# Altium PCB PCB.PcbDoc
Units mil, origin at the board's own origin, x right, y up, seen from the top; angles counter-clockwise.
Board outline 885.03 x 890.03 mil, 2 copper layers (Top Layer, Bottom Layer); 8 components, 6 nets, 27 pads, 2 vias.
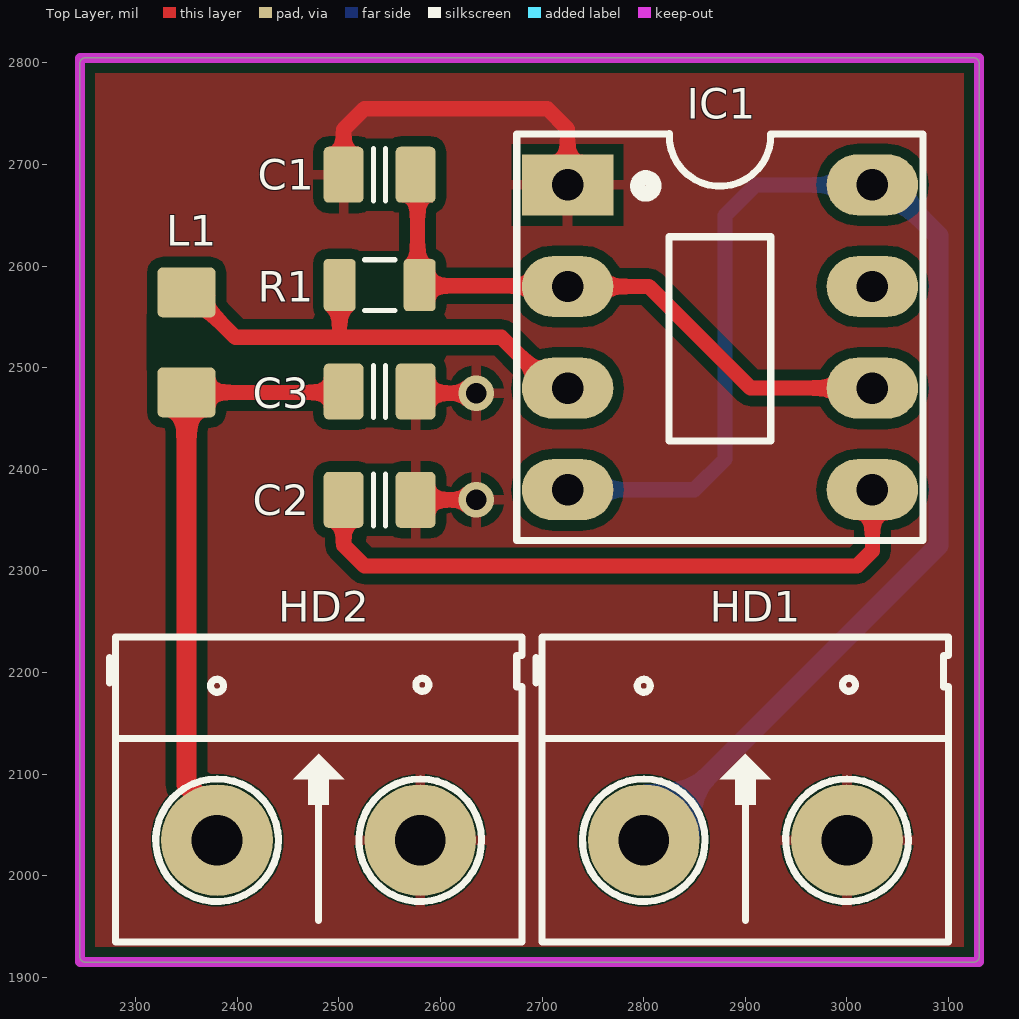
[diagram p0: Top Layer view]
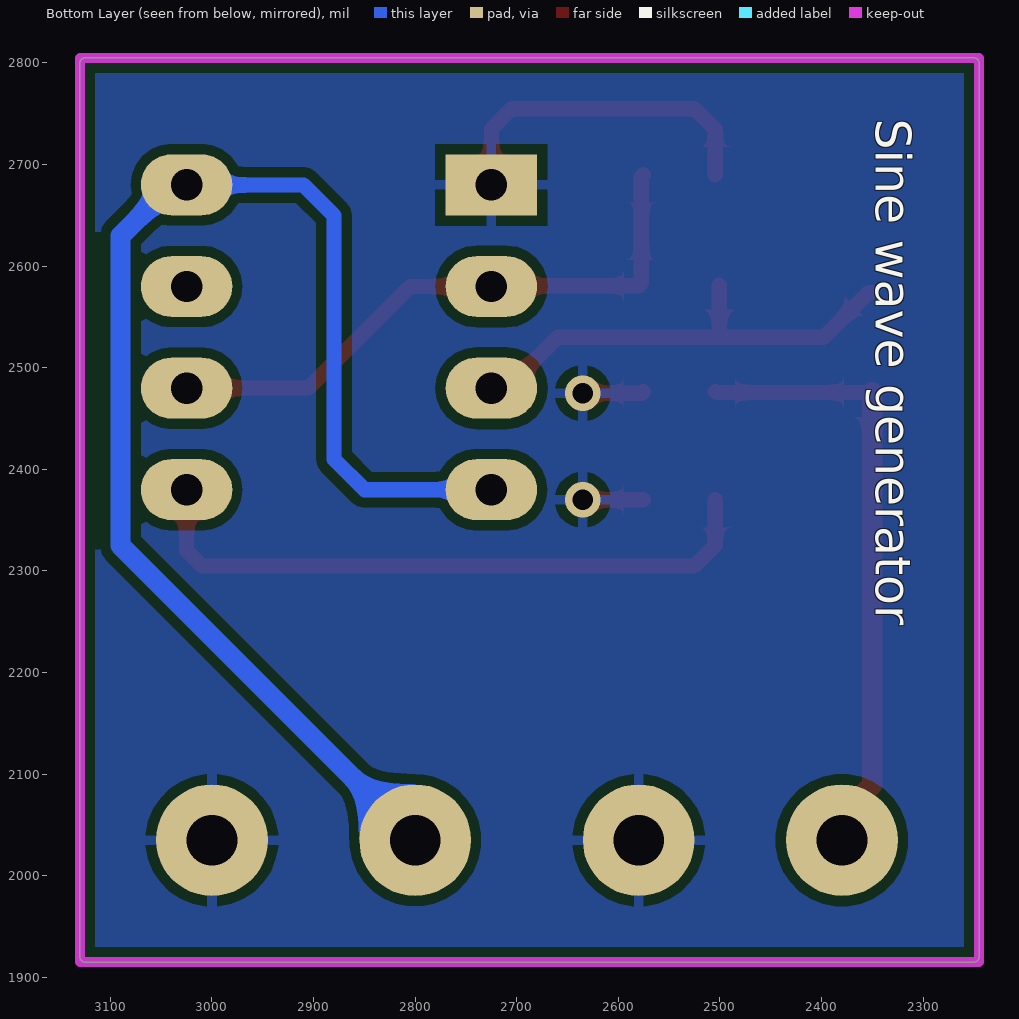
[diagram p1: Bottom Layer view, seen from below]
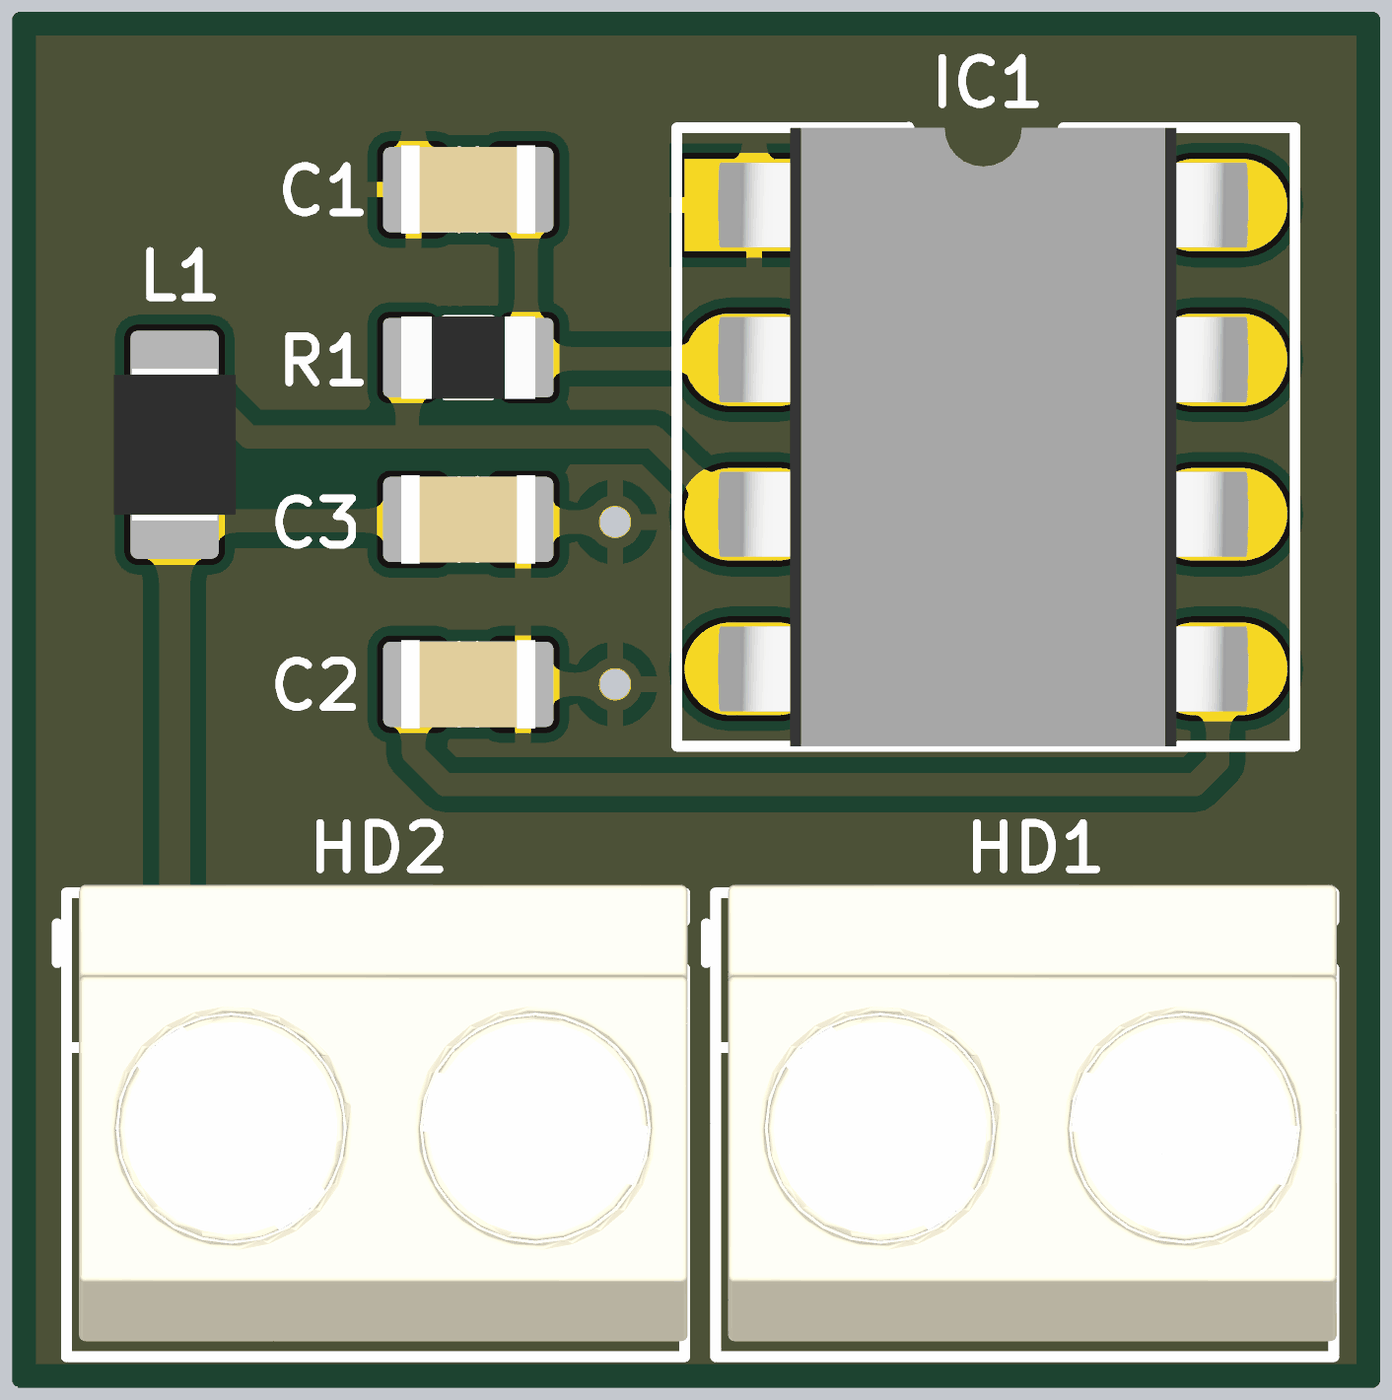
[diagram p2: 3D render of the assembled board from above, using the file's embedded part models]

## Layer stack, top to bottom
Top Solder: solder mask 0.4, Solder Resist, Dk 3.5
Top Layer: signal copper 1.4
Dielectric 1: dielectric 12.6, FR-4, Dk 4.8
Bottom Layer: signal copper 1.4
Bottom Solder: solder mask 0.4, Solder Resist, Dk 3.5

## Board outline
2244.99,1920 ccw(c2250,1920) 2250,1914.98 3125,1914.98 ccw(c3125,1920) 3130.01,1920 3130.01,2800 ccw(c3125,2800) 3125,2805.01 2250,2805.01 ccw(c2250,2800) 2244.99,2800

## Design rules (kind name [scope] priority, off if disabled: settings)
Clearance [All] p1: gap=10 ignorepadtopadclearanceinfootprint=FALSE
PolygonConnect [All] p1: connectstyle=Relief reliefconductorwidth=10 reliefentries=4 polygonreliefangle="90 Angle" airgapwidth=10
RoutingVias [All] p1: holewidth=20 width=35 viastyle="Through Hole" minholewidth=15 minwidth=25 maxholewidth=28 maxwidth=50
SolderMaskExpansion [All] p1: expansion=4 istentingtop=FALSE
Width [All] p1: maxlimit=50 minlimit=10 preferedwidth=20
30 further rules are at their usual default settings.

## Components (designator, comment, footprint, x,y, rotation, side; value= is the part's Value field where it differs from the comment)
C1 "approved sub OK" CAPC2012X135N 2540,2690 r0 top value=10nF
C2 "approved sub OK" CAPC2012X135N 2540,2370 r0 top value=100nF
C3 "approved sub OK" CAPC2012X135N 2540,2476.67 r0 top value=1uF
HD1 "Header 2" HED2 2800,2035 r0 top
HD2 "Header 2" HED2 2380,2035 r0 top
IC1 "LM555" DIP8/W0.3 2725,2680 r270 top
L1 "470u" INDM2520X190N 2350,2525 r270 top
R1 "Jumper" RESC2012N_ZERO 2540,2581.36 r180 top value=2.2k

## Footprints (in the part's own frame and the unit in brackets; to place one, negate y for a bottom-side part, rotate by r counter-clockwise, add the part's x,y. Pads: shape width x height; smd on the part's side, far side on the other; paste and mask are expansions set on the pad)
CAPC2012X135N [mm] "Chip Capacitor, Body 2.0x1.2mm, EIA 0805, IPC Medium Density"
  round 0.254 on Mech15: 0(0,0)
  rrect25% 1x1.4 smd: 1(-0.9,0) 2(0.9,0)
  Top Layer pour cut-out: -0.675,0.7 -0.475,0.9 0.475,0.9 0.675,0.7 0.675,-0.7 0.475,-0.9 -0.475,-0.9 -0.675,-0.7
  silkscreen extent -0.15,-0.65 0.15,0.65, body extent -1.1,-0.72 1.1,0.73, height 1.34
DIP8/W0.3 [mil] "8 PIN, W 300mil, Pin to pin 100mil"
  rect 60x90 hole 31: 1(0,0)
  oval 60x90 hole 31: 2(100,0) 3(200,0) 4(300,0) 5(300,300) 6(200,300) 7(100,300) 8(0,300)
  silkscreen extent -50,-50 350,350, body extent -50,-40 350,336, height 201
HED2 [mil] "Header 2, 2 pin, hight 300mil, Pin to Pin 200, Colour Green"
  round 110 hole 50: 1(0,0) 2(200,0)
  silkscreen extent -106,-100 300,200, body extent -92,-90 302,205, height 394
INDM2520X190N [mm] "Inductor, molded body 2.5x2.0mm"
  round 0.508 on Mech15: 0(0,0)
  rrect20% 1.25x1.45 smd: 1(-1.25,0) 2(1.25,0)
  Top Layer pour cut-out: -0.7,1 0.7,1 0.7,-1 -0.7,-1
  body extent -1.25,-1 1.25,1, height 1.79
RESC2012N_ZERO [mm] "Chip Resistor, Body 2.0x1.2mm, 0805, IPC Medium Density"
  round 0.254 on Mech15: 0(0,0)
  rrect25% 0.8x1.3 smd: 1(-1,0) 2(1,0)
  Top Layer pour cut-out: -0.725,0.65 -0.525,0.85 0.525,0.85 0.725,0.65 0.725,-0.65 0.525,-0.85 -0.525,-0.85 -0.725,-0.65
  silkscreen extent -0.38,-0.64 0.38,0.64, body extent -1.1,-0.67 1.1,0.68, height 0.69

## Part data
C1 C2 C3: library part "CAP C_0805", "Capacitor SMD Cer 1.8nF 10% 50V X7R 0805", Manufacturer 1="AVX Corporation", Manufacturer Part Number 1=08055C182KAT2A, Operating Temperature="-55°C ~ 125°C", Package / Case="0805 (2012 metric)", Ratings="50V; X7R", Supplier Part Number 1=478-1374-1-ND, Tolerance=±10%, SCDType=source*, Supplier 1=Digi-Key
HD1 HD2: "Header 2 (Green)"
IC1: "Timer"
L1: library part Inductor_1008, "Inductor SMD chip 47nH 1008", DC Resistance (DCR)="160 mOhm Max", Manufacturer 1="Abracon Corporation", Manufacturer Part Number 1=AISC-1008-R047J-T, Package / Case="1008 (2520 Metric)", Ratings="1 A", Supplier Part Number 1=535-10535-1-ND, Tolerance=±5%, Material=Ceramic, SCDType=source, Supplier 1=Digi-Key
R1: library part RES_0805, "Resistor SMD chip 0.0 Ohm 0.125W 0805", Manufacturer 1="Samsung Electro-Mechanics America, Inc", Manufacturer 2="Stackpole Electronics Inc", Manufacturer 3=Yageo, Manufacturer 4="Panasonic Electronic Components", Manufacturer 5="Rohm Semiconductor", Manufacturer Part Number 1=RC2012J000CS, Manufacturer Part Number 2=RMCF0805ZT0R00, Manufacturer Part Number 3=RC0805JR-070RL, Manufacturer Part Number 4=ERJ-6GEY0R00V, Manufacturer Part Number 5=MCR10ERTJ000, Package / Case="0805 (2012 metric)", Ratings=1/8W, Supplier Part Number 1=1276-5466-6-ND, Tolerance=N/A, ComponentLink1Description=http://www.samsungsem.com/servlet/FileDownload?filename=productcatalog/pdf/Chip_Resistor.pdf, ComponentLink1URL=http://www.samsungsem.com/servlet/FileDownload?filename=productcatalog/pdf/Chip_Resistor.pdf, ComponentLink2Description=http://www.seielect.com/Catalog/SEI-RMCF_RMCP.pdf, ComponentLink2URL=http://www.seielect.com/Catalog/SEI-RMCF_RMCP.pdf, ComponentLink3Description=http://media.digikey.com/pdf/Data%20Sheets/Yageo%20PDFs/RC0805%20Pb%20Free.pdf, ComponentLink3URL=http://media.digikey.com/pdf/Data%20Sheets/Yageo%20PDFs/RC0805%20Pb%20Free.pdf, ComponentLink4Description=http://industrial.panasonic.com/www-cgi/jvcr13pz.cgi?E+PZ+3+AOA0001+ERJ6GEY0R00V+7+WW, ComponentLink4URL=http://industrial.panasonic.com/www-cgi/jvcr13pz.cgi?E+PZ+3+AOA0001+ERJ6GEY0R00V+7+WW, ComponentLink5Description=http://rohmfs.rohm.com/en/products/databook/datasheet/passive/resistor/chip_resistor/mcr_g.pdf, ComponentLink5URL=http://rohmfs.rohm.com/en/products/databook/datasheet/passive/resistor/chip_resistor/mcr_g.pdf, RoHS 1="RoHS Compliant", RoHS 2="RoHS Compliant", RoHS 3="RoHS Compliant", RoHS 4="RoHS Compliant", RoHS 5="RoHS Compliant", SCDType=spec, Supplier 1=Digi-Key, Supplier 2=Digi-Key, Supplier 3=Digi-Key, Supplier 4=Digi-Key, Supplier 5=Digi-Key, Supplier Part Number 2=RMCF0805ZT0R00DKR-ND, Supplier Part Number 3=311-0.0ARDKR-ND, Supplier Part Number 4=P0.0ADKR-ND, Supplier Part Number 5=RHM0.0CPDKR-ND

## Via types
v1: diameter 35, hole 20, Top Layer to Bottom Layer, tented both sides, 2 vias

## Nets (pads, with @x,y where several pads share a name; then routed paths per layer and width w, separated by ;. In a path a pad name is that pad's centre, name@x,y a point inside that pad or via, vN(x,y) a via of type N, cw(c..) or ccw(c..) an arc to the next point about the centre after c; other vN are vias at no path point)
+4.5: HD1.1 IC1.4 IC1.8 | length 1365.7
  Bottom Layer w15: IC1.4 2850,2380 2880,2410 2880,2650 2910,2680 IC1.8
  Bottom Layer w20: HD1.1 3090,2325 3090,2630 3040,2680 IC1.8
GND: C1.1 C2.2 C3.2 HD1.2 HD2.2 IC1.1 | length 456.6
  Top Layer w15: C1.1 2504.57,2734.57 2525,2755 2705,2755 2725,2735 IC1.1 ; C2.2 v1(2635,2370) ; C3.2 2577.1,2475 v1(2635,2475)
NetC1_2: C1.2 IC1.2 IC1.6 R1.1 | length 597.9
  Top Layer w15: C1.2 2577.4,2688.03 2577.4,2583.33 R1.1 2580.05,2580.68 2724.32,2580.68 IC1.2 2805,2580 2905,2480 IC1.6
NetC2_1: C2.1 IC1.5 | length 639.7
  Top Layer w15: C2.1 2504.57,2325.43 2525,2305 3010,2305 3025,2320 IC1.5
NetC3_1: C3.1 HD2.1 L1.2 | length 611.1
  Top Layer w15: L1.2 2503.69,2475.79 C3.1 ; HD2.1@2377.89,2032.89 HD2.1
  Top Layer w20: L1.2 2350,2089.35 2380,2059.35 HD2.1
NetIC1_3: IC1.3 L1.1 R1.2 | length 465.6
  Top Layer w15: L1.1 2353.94,2574.21 2398.15,2530 2500,2530 ; R1.2 2500.63,2530.63 2500,2530 ; IC1.3 2710,2480 2660,2530 2500,2530
pads on no net: C1.0 C2.0 C3.0 IC1.7 L1.0 R1.0

## Polygon pours and split planes (outlines as drawn)
GND on Top Layer "GND_L01_P004" (solid, remove dead copper, pour order 4): 2245,2805 3130,2805 3130,1915 2245,1915
GND on Top Layer "GND_L01_P000" (solid, remove dead copper, pour order 0): 2245,2805 3130,2805 3130,1915 2245,1915
GND on Bottom Layer "GND_L02_P005" (solid, remove dead copper, pour order 5): 2245,2805 3130,2805 3130,1915 2245,1915
GND on Bottom Layer "GND_L02_P001" (solid, remove dead copper, pour order 1): 2245,2805 3130,2805 3130,1915 2245,1915

## Keep-outs
Keep-Out Layer:
  lines w10: 2245,1915 2245,2805 3130,2805 3130,1915 2245,1915

## Silkscreen, mask and mechanical layers (free items; w line width, h text height)
Bottom Overlay:
  text "Sine wave generator" at 2358.29,2745.06 h60 r90